# Altium PCB Power_Right.PcbDoc
Units mil, origin at the board's own origin, x right, y up, seen from the top; angles counter-clockwise.
Board outline 2535.83 x 834.65 mil, 2 copper layers (Top Layer, Bottom Layer); 3 components, 2 nets, 11 pads, 0 vias.
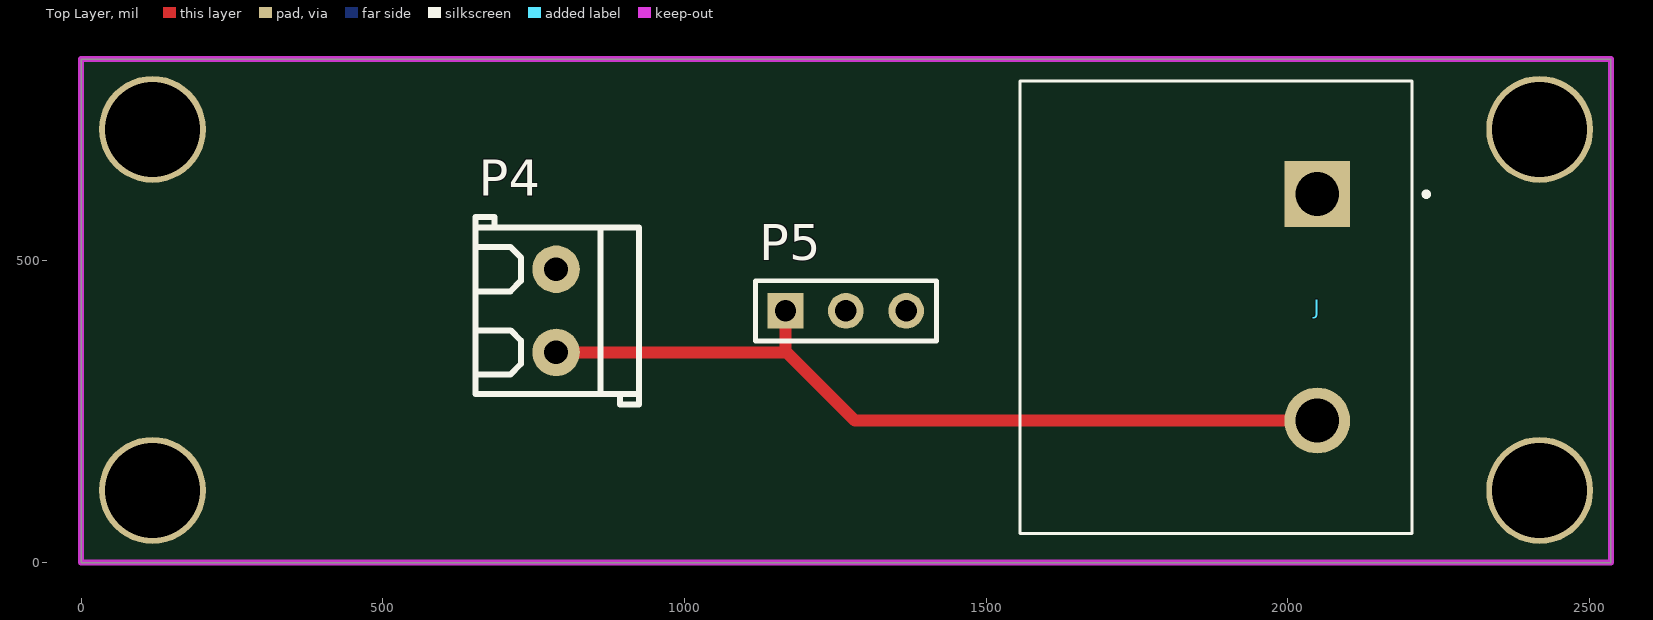
[diagram p0: Top Layer view]
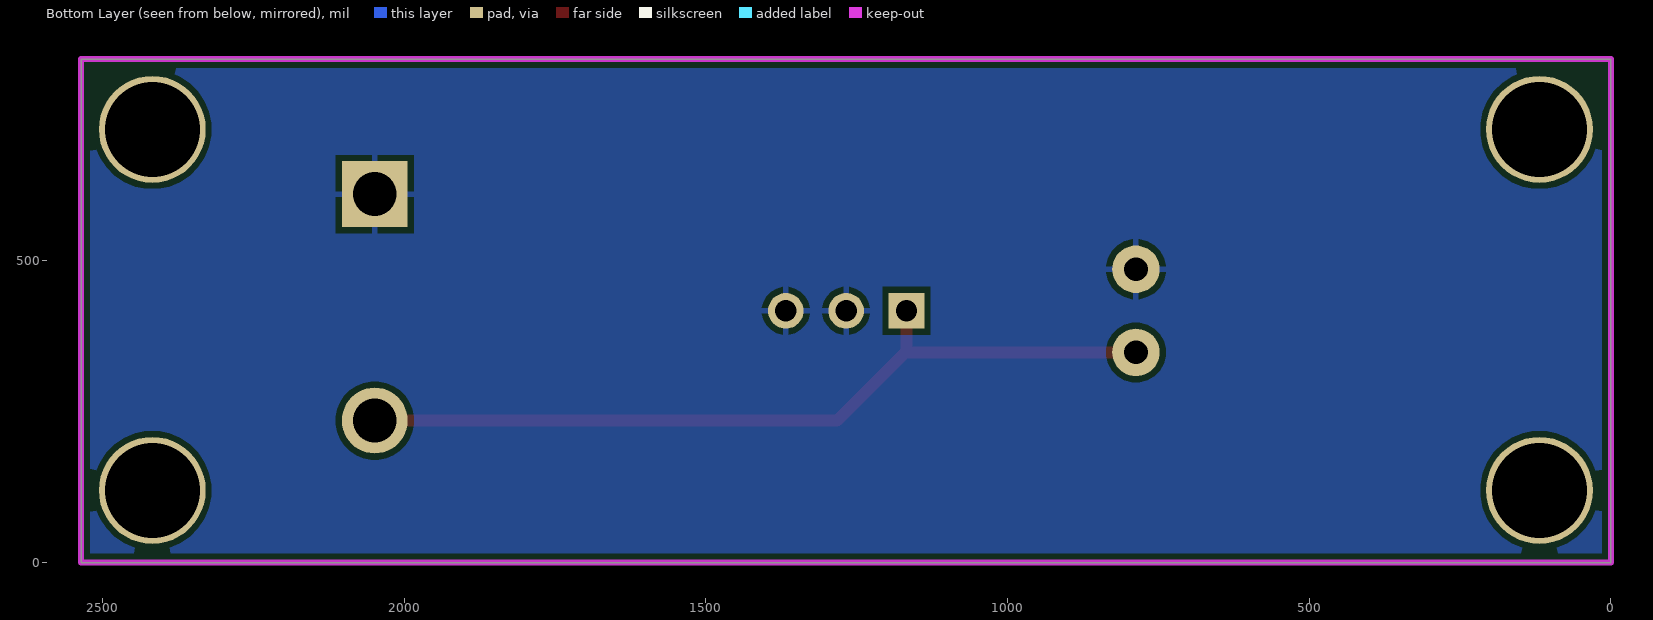
[diagram p1: Bottom Layer view, seen from below]

## Layer stack, top to bottom
Top Solder: solder mask 0.4, Solder Resist, Dk 3.5
Top Layer: signal copper 1.4
Dielectric 1: dielectric 12.6, FR-4, Dk 4.8
Bottom Layer: signal copper 1.4
Bottom Solder: solder mask 0.4, Solder Resist, Dk 3.5

## Board outline
0,0 0,834.65 2535.83,834.65 2535.83,0

## Design rules (kind name [scope] priority, off if disabled: settings)
Clearance [All] p1: gap=10 ignorepadtopadclearanceinfootprint=FALSE
PolygonConnect [All] p1: connectstyle=Relief reliefconductorwidth=10 reliefentries=4 polygonreliefangle="90 Angle" airgapwidth=10
RoutingVias [All] p1: holewidth=28 width=50 viastyle="Through Hole" minholewidth=28 minwidth=50 maxholewidth=28 maxwidth=50
SolderMaskExpansion [All] p1: expansion=4 istentingtop=FALSE
SupplyNets "Schematic Supply Nets_1" [InNet('GND')] p1: voltage=0.000
SupplyNets "Schematic Supply Nets" [InNet('+24')] p2: voltage=0.000
Width [All] p1: maxlimit=100 minlimit=10 preferedwidth=10
30 further rules are at their usual default settings.

## Components (designator, comment, footprint, x,y, rotation, side; value= is the part's Value field where it differs from the comment)
J "1546833-2" TE_1546833-2 2049,423 r270 top
P4 "2P Screw Terminal Block" "P_Terminal block 3.5mm-pitch" 787.4,417.32 r270 top
P5 "Header 3" HDR1X3 1167.72,417.32 r0 top

## Footprints (in the part's own frame and the unit in brackets; to place one, negate y for a bottom-side part, rotate by r counter-clockwise, add the part's x,y. Pads: shape width x height; smd on the part's side, far side on the other; paste and mask are expansions set on the pad)
HDR1X3 [mm] "Connector; Header; 3 Position"
  rect 1.5x1.5 hole 0.9: 1(0,0)
  round 1.5 hole 0.9: 2(2.54,0) 3(5.08,0)
  silkscreen extent -1.27,-1.27 6.35,1.27
"P_Terminal block 3.5mm-pitch" [mm]
  round 2 hole 1: 1(-1.75,0) 2(1.75,0)
  silkscreen extent -3.95,-3.4 3.95,3.5, body extent -3.5,-3.4 3.5,3.4, height 8.4
TE_1546833-2 [mm]
  rect 2.775x2.775 hole 1.85: 1(-4.765,0)
  round 2.775 hole 1.85: 2(4.765,0)
  silkscreen extent -9.53,-12.52 9.53,4.69

## Part data
J: "2 Circuit 0.375 (9.53mm) Barrier Block Connector, Screws with Captive Plate", Package=None, Availability=Warning, DigiKey-Purchase-URL=https://snapeda.com/shop?store=DigiKey&id=2375941, MF="TE Connectivity", Mouser-Purchase-URL=https://snapeda.com/shop?store=Mouser&id=2375941, MP=1546833-2, Price=None, SnapEDA_Link=https://www.snapeda.com/parts/1546833-2/TE%20Connectivity%20AMP%20Connectors/view-part/2375941/?ref=snap
P4: library part "P_Terminal block", "Green Straight pin 3.5mm  pitch; P=3.5mm  Screw terminal ROHS", LCSC Part#=C474892, Manufacturer="Cixi Kefa Elec", MFR Part #=KF350-3.5-2P, Datasheet=https://datasheet.lcsc.com/lcsc/2001160007_Cixi-Kefa-Elec-KF350-3-5-2P_C474892.pdf
P5: "Header, 3-Pin", LatestRevisionDate=17-Jul-2002, LatestRevisionNote="Re-released for DXP Platform.", Publisher="Altium Limited"

## Free pads (board coordinates)
  round 177.17 hole 157.48: 14(118.5,119.68) 14(118.5,718.11) 14(2417.72,119.68) 14(2417.72,718.11)

## Nets (pads, with @x,y where several pads share a name; then routed paths per layer and width w, separated by ;. In a path a pad name is that pad's centre, name@x,y a point inside that pad or via, vN(x,y) a via of type N, cw(c..) or ccw(c..) an arc to the next point about the centre after c; other vN are vias at no path point)
+24: J.2 P4.2 P5.1 | length 1377
  Top Layer w20: P4.2 1165.86,348.43 1167.72,350.28 ; P5.1 1167.72,350.28 ; J.2 1282.6,235.4 1167.72,350.28
GND: J.1 P4.1 P5.2 P5.3

## Polygon pours and split planes (outlines as drawn)
GND on Bottom Layer "GND_L02_P000" (solid, pour order 0): 0,834 0,0 2537,0 2536,1 2536,835

## Keep-outs
Keep-Out Layer:
  the board outline again, w10